# EAGLE board Task 2 (EAGLE 7.6.0)

Size 73.58 x 88.79 mm. Coordinates in mm from the lower left corner, seen from the top.
Outline: 0,0 56.82,0 56.82,53.33 0,53.33 0,0
Copper layers (1*16): Top 0.035mm / dielectric 1.5mm / Bottom 0.035mm
Design rules "default": minimum track width 10mil, minimum drill 24mil, track to track 8mil, track to pad 8mil, pad to pad 8mil, via to via 8mil, smd to smd 8mil, copper to edge 40mil, drill to drill 8mil, minimum pad ring 10mil, minimum via ring 8mil, stop-mask expansion 4mil, vias tented up to drill 0mil, thermal gap 10mil

## Footprints (pad centres in the part's own frame; a part is rotated, then mirrored left to right if it is on the bottom)
B25V = drill 0.813 long: A 2.54,0.635; E -2.54,0.635; S 0,0.635
1X3P-2.54-2.54-11.6-3.0-BLACK-MALE = drill 0.889 pad 1.651 square: 1 0,2.54 | drill 0.889 pad 1.651: 2 0,0; 3 0,-2.54
ARDUINO_UNO = drill 1.016 pad 1.88: 0 63.5,50.8; 1 60.96,50.8; 2 58.42,50.8; 3 55.88,50.8; 3.3V 35.56,2.54; 4 53.34,50.8; 5 50.8,50.8; 5V 38.1,2.54; 6 48.26,50.8; 7 45.72,50.8; 8 41.656,50.8; 9 39.116,50.8; 10 36.576,50.8; 11 34.036,50.8; 12 31.496,50.8; 13 28.956,50.8; A0 50.8,2.54; A1 53.34,2.54; A2 55.88,2.54; A3 58.42,2.54; A4 60.96,2.54; A5 63.5,2.54; AREF 23.876,50.8; GND 26.416,50.8; GND. 43.18,2.54; GND.. 40.64,2.54; I/OREF 30.48,2.54; N/C 27.94,2.54; RESET 33.02,2.54; SCL 18.796,50.8; SDA 21.336,50.8; VIN 45.72,2.54 | hole 3.2: 66.04,7.62; 66.04,35.56; 15.24,50.8; 13.97,2.54

## Placement (x,y rotation side)
RpotPotentiometerR1  10k‎Ω  [B25V]  5,60.88 0 top
RpotPotentionmeterL1  10k‎Ω  [B25V]  5,48.18 0 top
SERVOServoLeft  [1X3P-2.54-2.54-11.6-3.0-BLACK-MALE]  5,22.78 0 top
SERVOServoRight  [1X3P-2.54-2.54-11.6-3.0-BLACK-MALE]  5,10.08 0 top
UArduino  [ARDUINO_UNO]  5,35.48 0 top

## Library data of the parts
RpotPotentiometerR1 RpotPotentionmeterL1 SERVOServoLeft SERVOServoRight UArduino = AUTODESK_CIRCUITS_BREADBOARD

## Nets
N$1: RpotPotentiometerR1.E RpotPotentionmeterL1.E SERVOServoLeft.1 SERVOServoRight.1 UArduino.GND..
N$2: RpotPotentiometerR1.A RpotPotentionmeterL1.A SERVOServoLeft.2 SERVOServoRight.2 UArduino.5V
N$3: RpotPotentionmeterL1.S UArduino.A0
N$4: RpotPotentiometerR1.S UArduino.A1
N$5: SERVOServoLeft.3 UArduino.10
N$6: SERVOServoRight.3 UArduino.9

## Tracks (layer width: path | path; a pad name or v marks a point on that pad's centre or on a via)
N$1  (4 unrouted)
N$2  (4 unrouted)
N$3  (1 unrouted)
N$4  (1 unrouted)
N$5  (1 unrouted)
N$6  (1 unrouted)